# Altium PCB CH32V307V-R1-1v0.PcbDoc (part 2 of 2)
Units mil, origin at the board's own origin, x right, y up, seen from the top; angles counter-clockwise.
Board outline 2913.39 x 4072 mil, 2 copper layers (Top Layer, Bottom Layer); 76 components, 135 nets, 475 pads, 552 vias.
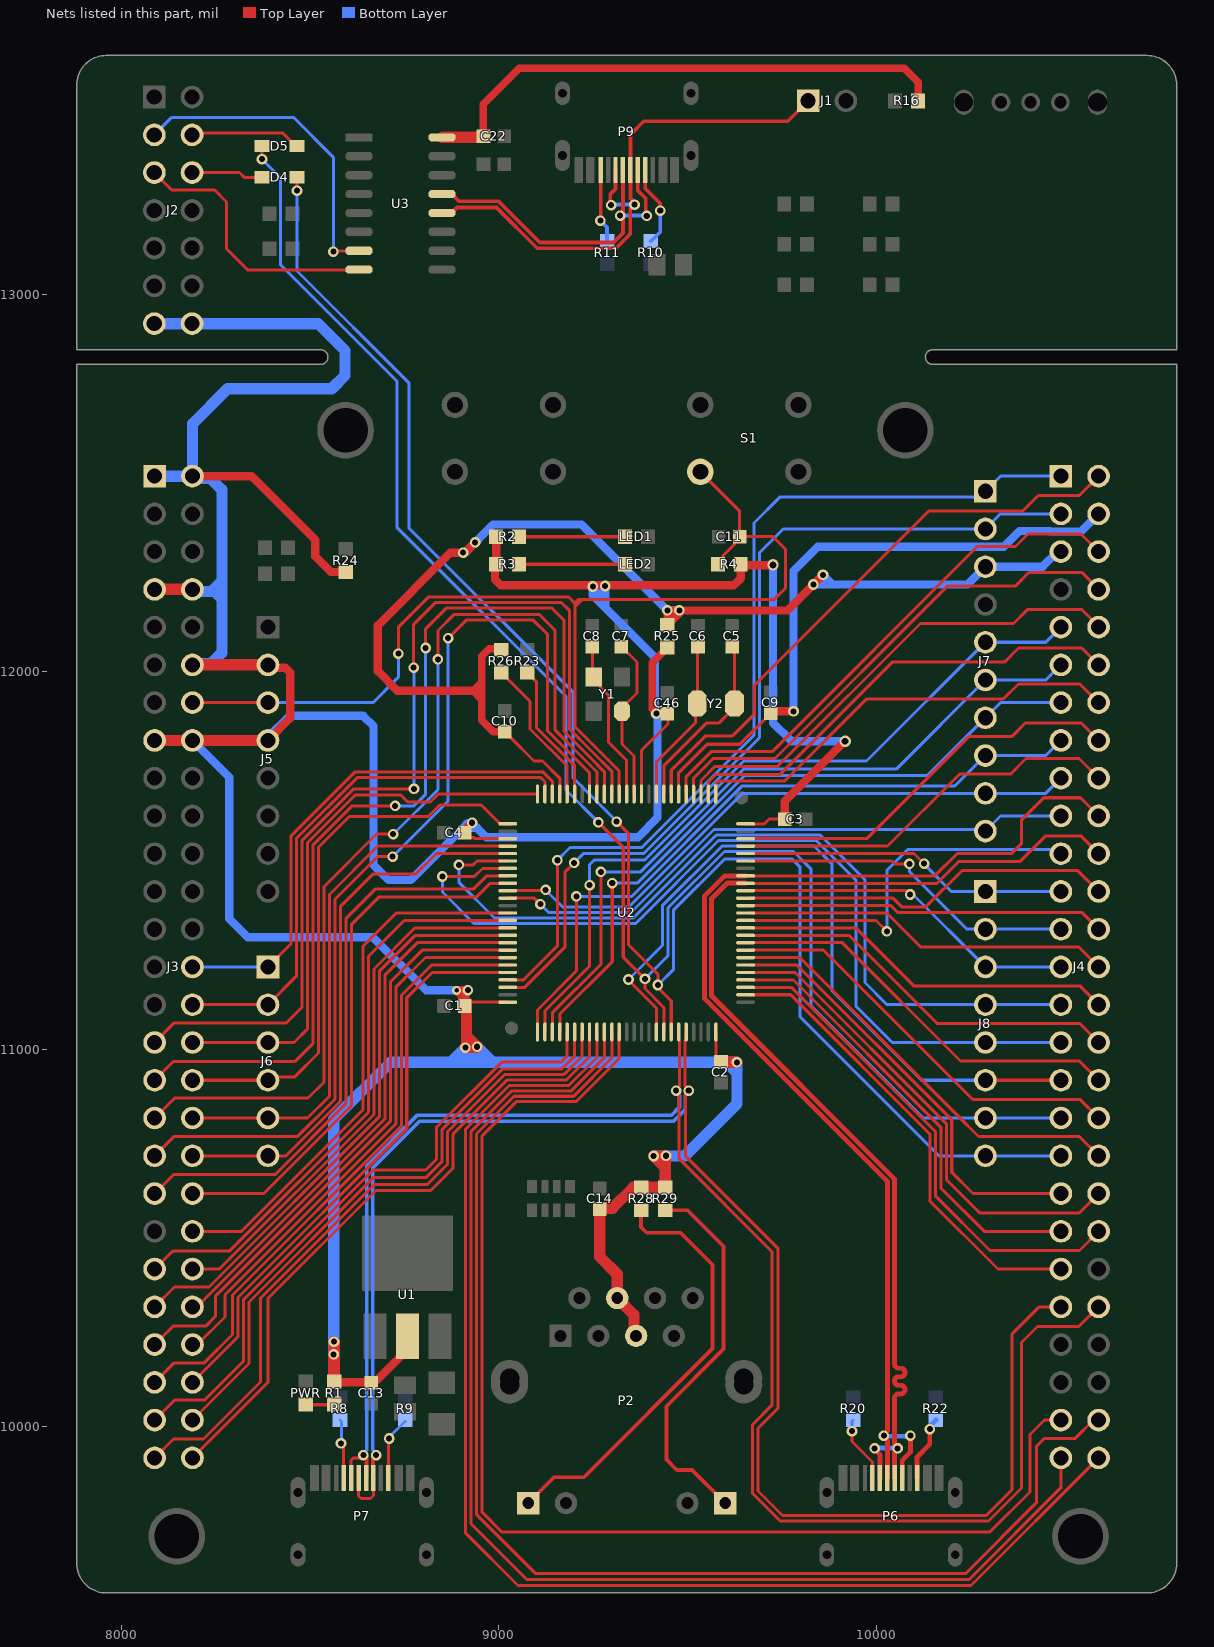
[diagram p2: the nets of this part, all layers, seen from the top]

## Via types
v1: diameter 24, hole 12, Top Layer to Bottom Layer, tented both sides, 414 vias
v2: diameter 28, hole 16, Top Layer to Bottom Layer, tented both sides, 136 vias
v3: diameter 30, hole 18, Top Layer to Bottom Layer, tented both sides, 2 vias

## Nets (pads, with @x,y where several pads share a name; then routed paths per layer and width w, separated by ;. In a path a pad name is that pad's centre, name@x,y a point inside that pad or via, vN(x,y) a via of type N, cw(c..) or ccw(c..) an arc to the next point about the centre after c; other vN are vias at no path point) (continued)
NetLED1_1: LED1.1 R2.2 | length 280.8
  Top Layer w10: R2.2@9053.09,12357.58 LED1.1@9333.89,12357.58
NetLED2_1: LED2.1 R3.2 | length 280.8
  Top Layer w10: R3.2@9053.09,12284.43 LED2.1@9333.89,12284.43
NetP2_9: P2.9 R28.2 | length 1154.7
  Top Layer w10: P2.9@9077.56,9798.21 9145.89,9866.54 9224.83,9866.54 9565.81,10207.51 9565.81,10429.31 9480.64,10514.49 9391.35,10514.49 9376.51,10529.32 R28.2@9376.51,10573.74
NetP2_12: P2.12 R29.2 | length 1024.6
  Top Layer w10: R29.2@9440.75,10573.74 9499.39,10573.74 9594.8,10478.33 9594.8,10206.17 9443.54,10054.91 9443.54,9913.35 9471.05,9885.85 9511.57,9885.85 P2.12@9599.21,9798.21
NetP6_A5: P6.A5 R20.2 | length 177.4
  Top Layer w8: v2(9934.99,9988.7) 9934.99,9961.46 9989.1,9907.36 P6.A5@9989.1,9864.31
  Bottom Layer w8: v2(9934.99,9988.7) 9934.99,10015.31 R20.2@9937.83,10018.14
NetP6_B5: P6.B5 R22.2 | length 175.1
  Top Layer w12.7: P6.B5@10107.21,9864.31 10107.21,9920.3 10140.95,9954.04 v2(10140.95,9994.1)
  Bottom Layer w12.7: v2(10140.95,9994.1) 10140.95,9998.24 10144.26,10001.56 10144.26,10006.18 10156.22,10018.14 R22.2@10157.21,10018.14
NetP7_A5: P7.A5 R8.2 | length 159.1
  Top Layer w8: v2(8581.6,9956.4) 8581.6,9951.26 8588.86,9944 P7.A5@8588.86,9864.31
  Bottom Layer w8: R8.2@8578.92,10018.14 8582.94,10014.12 8582.94,9957.74 v2(8581.6,9956.4)
NetP7_B5: P7.B5 R9.2 | length 169.2
  Top Layer w8: P7.B5@8706.97,9864.31 8707.96,9865.3 8707.96,9968.38 v2(8708.95,9969.37)
  Bottom Layer w8: v2(8708.95,9969.37) 8708.95,9972.36 8750.92,10014.33 R9.2@8751.9,10014.33
NetP9_A5: P9.A5 R10.1 | length 215.9
  Top Layer w10: P9.A5@9387.4,13329.24 9387.4,13280.03 9427.13,13240.3 v2(9427.13,13221.26)
  Bottom Layer w10: R10.1@9402.41,13140.64 9403.4,13140.64 9427.13,13164.37 v2(9427.13,13221.26)
NetP9_B5: P9.B5 R11.1 | length 196.3
  Top Layer w10: v2(9268.62,13194.6) 9269.29,13195.28 P9.B5@9269.29,13329.24
  Bottom Layer w10: v2(9268.62,13194.6) 9286.06,13177.16 9286.06,13141.05 R11.1@9286.47,13140.64
NetPWR_1: PWR.1 R1.1 | length 64.7
  Top Layer w10: PWR.1@8499.15,10058.67 8562.91,10058.67 R1.1@8563.58,10059.33
NRST: C11.2 J3.14 J5.3 R4.1 S1.1 U2.14 | length 2920.5
  Top Layer w8: J3.14@8188.19,11918.11 J5.3@8388.19,11918.11 ; v2(8733.62,12048.22) 8733.62,12118.08 8814.04,12198.51 9183.98,12198.51 9200.79,12181.69 ; U2.14@9318.51,11676.04 9318.51,11737.12 9249.59,11806.03 9200.79,11854.83 9200.79,12172.22 ; S1.1@9533.27,12529.53 9540.98,12521.82 9637.49,12425.3 C11.2@9637.49,12357.58 ; R4.1@9579.67,12284.43 9593.48,12298.24 9593.48,12306.9 9623.99,12337.42 9623.99,12344.08 C11.2@9637.49,12357.58 ; 9200.79,12172.22 9200.79,12181.69 ; 9200.79,12172.22 9220.54,12191.97 ; 9200.79,12181.69 9211.06,12191.97 9220.54,12191.97 ; 9220.54,12191.97 9729.36,12191.97 9758.81,12221.42 9758.81,12324.7 9725.93,12357.58 C11.2@9637.49,12357.58
  Bottom Layer w8: J5.3@8388.19,11918.11 8666.11,11918.11 8733.62,11985.62 v2(8733.62,12048.22)
PA0: J3.28 J6.1 U2.23 | length 1378
  Top Layer w8: J6.1@8388.19,11218.11 8448.9,11278.82 8448.9,11564.47 8618.34,11733.91 9117.36,11733.91 9141.34,11709.93 U2.23@9141.34,11676.04
  Bottom Layer w8: J3.28@8188.19,11218.11 J6.1@8388.19,11218.11
PA1: J3.30 J6.2 U2.24 | length 1433.8
  Top Layer w8: J3.30@8188.19,11118.11 J6.2@8388.19,11118.11 8463.4,11193.32 8463.4,11558.46 8624.35,11719.41 9111.35,11719.41 9121.66,11709.11 U2.24@9121.66,11676.04
PA2: J3.32 J6.3 U2.25 | length 1489.8
  Top Layer w8: J3.32@8188.19,11018.11 J6.3@8388.19,11018.11 8457.18,11018.11 8492.4,11053.33 8492.4,11546.45 8618.92,11672.97 8740.83,11672.97 8758.5,11655.31 8818.8,11655.31 8839.53,11676.04 U2.25@9101.97,11676.04
PA3: J3.34 J6.4 U2.26 | length 1486.8
  Top Layer w8: J3.34@8188.19,10918.11 J6.4@8388.19,10918.11 8397.25,10927.17 8459.14,10927.17 8522.01,10990.04 8522.01,11535.05 8603.96,11617 8813.42,11617 8843.45,11647.03 8953,11647.03 9002.73,11597.3 U2.26@9033.25,11597.3
PA4: J3.36 J6.5 U2.29 | length 1456.3
  Top Layer w8: J3.36@8188.19,10818.11 J6.5@8388.19,10818.11 8493.17,10818.11 8551.02,10875.96 8551.02,11410.12 8679.14,11538.24 8833.35,11538.24 U2.29@9033.25,11538.24
PA5: J3.38 J6.6 U2.30 | length 1478.9
  Top Layer w8: J3.38@8188.19,10718.11 8436.19,10718.11 8580.02,10861.94 8580.02,11377.93 8666.85,11464.75 8780.53,11464.75 8834.34,11518.56 U2.30@9033.25,11518.56
PA6: J4.29 J8.4 U2.31 | length 2250.4
  Top Layer w8: v2(8893.62,11488.68) 8931.68,11488.68 8941.88,11498.87 U2.31@9023.23,11498.87
  Bottom Layer w8: v2(8893.62,11488.68) 8893.62,11442.58 8988.21,11347.99 9355.91,11347.99 9575.61,11567.69 9850.54,11567.69 9969.29,11448.93 9969.29,11176.73 10027.91,11118.11 J8.4@10288.19,11118.11 J4.29@10488.19,11118.11
PA7: J4.31 J8.5 U2.32 | length 2403.5
  Top Layer w8: v2(8850.26,11457.64) 8934.59,11457.64 8956.13,11479.19 U2.32@9023.23,11479.19
  Bottom Layer w8: v2(8850.26,11457.64) 8850.26,11416.57 8933.34,11333.49 9361.92,11333.49 9581.62,11553.19 9840.41,11553.19 9945.53,11448.06 9945.53,11114.28 10041.71,11018.11 J8.5@10288.19,11018.11 J4.31@10488.19,11018.11
PA8: J4.33 J8.6 U2.67 | length 1976.8
  Top Layer w8: v2(9343,11185) 9343,11182.95 9416.93,11109.02 U2.67@9416.93,11046.12 ; J8.6@10288.19,10918.11 J4.33@10488.19,10918.11
  Bottom Layer w8: v2(9343,11185) 9343,11185.1 9432.66,11274.76 9432.66,11380.3 9591.05,11538.69 9834.4,11538.69 9882.61,11490.48 9882.61,11154.73 10119.23,10918.11 J8.6@10288.19,10918.11
PA9: D5.2 J4.35 J8.7 U2.68 | length 4607.8
  Top Layer w8: v2(8372.34,13357.58) 8372.34,13392.15 D5.2@8372.55,13392.36 ; v2(9263.26,11601.13) 9329.17,11535.21 9329.17,11243.95 9386.43,11186.68 v2(9386.82,11186.68) 9386.82,11160.83 9436.62,11111.03 U2.68@9436.62,11046.12
  Bottom Layer w8: v2(8372.34,13357.58) 8420.92,13308.99 8420.92,13078.58 8729.61,12769.89 8729.61,12382.76 9177.39,11934.98 9177.39,11687 v2(9263.26,11601.13) ; v2(9386.82,11186.68) 9447.16,11247.03 9447.16,11374.29 9597.05,11524.19 9779.82,11524.19 9826.95,11477.05 9826.95,11114.74 10123.58,10818.11 J8.7@10288.19,10818.11 J4.35@10488.19,10818.11
PA10: D4.1 J4.37 J8.8 U2.69 | length 4530
  Top Layer w8: v2(8465.11,13273.99) 8465.11,13301.75 D4.1@8472.77,13309.41 ; v2(9311.81,11603.17) 9343.67,11571.31 9343.67,11276.29 9421.02,11198.94 v2(9421.02,11170.43) ; v2@9417.32,11166.72 9456.3,11127.74 U2.69@9456.3,11046.12
  Bottom Layer w8: v2(8465.11,13273.99) 8465.11,13061.4 8761.18,12765.32 8761.18,12380.76 9196.52,11945.42 9196.52,11718.46 v2(9311.81,11603.17) ; v2(9421.02,11170.43) 9461.66,11211.06 9461.66,11368.29 9597.05,11503.68 9776.71,11503.68 9796.86,11483.53 9796.86,11086.8 10165.54,10718.11 J8.8@10288.19,10718.11 J4.37@10488.19,10718.11
PA11: J4.46 P7.A7 P7.B7 U2.70 | length 4627.8
  Top Layer w8: P7.B7@8608.55,9864.31 8608.55,9912.31 8613.82,9917.58 8640.59,9917.58 v2@8641.73,9918.72 ; v2@8644.53,9921.52 v2@8641.73,9918.72 ; v2@8649.61,9917.74 8648.79,9917.74 8648.08,9917.74 8647.1,9918.72 v2@8641.73,9918.72 ; v2(9469.08,10890.77) 9469.08,10894.74 9478.58,10904.24 9478.58,11023.03 9475.99,11025.62 U2.70@9475.99,11046.12 ; v2@9472.71,10887.49 9472.71,10881.99 9477.35,10877.35 9477.35,10709.99 9722.47,10464.87 9722.47,10057.03 9671.39,10005.94 9671.39,10002.5 9671.29,10002.4 9671.29,9824.33 9744.95,9750.66 10296.22,9750.66 10384,9838.44 10384,10223.47 10426.32,10265.79 10535.87,10265.79 J4.46@10588.19,10318.11
  Top Layer w10: v2(8641.01,9925.05) 8641.48,9925.05 8648.79,9917.74 v2@8648.95,9917.58 ; P7.A7@8647.92,9864.31 8648.82,9865.22 8648.82,9904.27 8649.61,9905.06 v2@8649.61,9917.74
  Bottom Layer w10: v2(8641.01,9925.05) 8641.01,9929.73 8650.01,9938.73 8650.01,10691.88 8783.3,10825.18 9456.16,10825.18 9478.08,10847.1 9478.08,10877.08 9469.08,10886.08 v2(9469.08,10890.77)
PA12: J4.45 P7.A6 P7.B6 U2.71 | length 4569.4
  Top Layer w8: P7.A6@8628.23,9864.31 8628.23,9817.24 8634.96,9810.51 8659.61,9810.51 8667.6,9818.5 P7.B6@8667.6,9864.31 ; U2.71@9495.67,11046.12 9495.67,11025.62 9493.08,11023.03 9493.08,10904.24 ; v2@9498.94,10887.49 9498.94,10881.99 9494.31,10877.35 9494.31,10717.02 9739.43,10471.89 9739.43,10050 9685.81,9996.38 9685.81,9830.34 9750.97,9765.18 10290.2,9765.18 10359.26,9834.24 10359.26,10246.41 10430.96,10318.11 J4.45@10488.19,10318.11 ; v2(9502.58,10890.77) v2@9502.58,10892.75 ; 9493.08,10904.24 9493.08,10902.25 v2@9502.58,10892.75 ; 9493.08,10904.24 9502.58,10894.74 v2@9502.58,10892.75
  Top Layer w10: P7.B6@8667.6,9864.31 8666.7,9865.22 8666.7,9904.27 8665.51,9905.46 8665.51,9917.66 8672.89,9925.05 v2(8674.51,9925.05)
  Bottom Layer w10: v2(8674.51,9925.05) 8674.51,9929.73 8665.51,9938.73 8665.51,10685.46 8789.72,10809.68 9462.58,10809.68 9493.58,10840.67 9493.58,10877.08 9502.58,10886.08 v2@9502.58,10886.79
PA15: J4.43 U2.77 | length 1229.9
  Top Layer w8: U2.77@9663.17,11144.54 9772.45,11144.54 10141.12,10775.87 10141.12,10598.34 10321.35,10418.11 J4.43@10488.19,10418.11
PB0: J4.17 J7.9 U2.35 | length 1625.8
  Top Layer w8: U2.35@9023.23,11420.13 9121.46,11420.13 v2(9123.45,11422.13)
  Bottom Layer w8: v2(9123.45,11422.13) 9168.59,11376.99 9343.9,11376.99 9645.02,11678.11 J7.9@10288.19,11678.11 10448.19,11678.11 J4.17@10488.19,11718.11
PB1: J4.19 J7.10 U2.36 | length 1589.9
  Top Layer w8: U2.36@9023.23,11400.45 9093.66,11400.45 v2(9109.6,11384.51)
  Bottom Layer w8: v2(9109.6,11384.51) 9131.62,11362.49 9349.91,11362.49 9569.6,11582.19 10284.11,11582.19 J7.10@10288.19,11578.11 10328.19,11618.11 J4.19@10488.19,11618.11
PB3: J4.26 U2.89 | length 951
  Top Layer w8: U2.89@9663.17,11380.76 10037.7,11380.76 10055.59,11362.88 10543.42,11362.88 J4.26@10588.19,11318.11
PB4: J4.24 U2.90 | length 997.2
  Top Layer w8: U2.90@9663.17,11400.45 10043.92,11400.45 10066.99,11377.38 10130.51,11377.38 10226.46,11473.33 10532.97,11473.33 J4.24@10588.19,11418.11
PB5: J4.27 J8.3 U2.91 | length 912.8
  Top Layer w8: U2.91@9663.17,11420.13 10078.16,11420.13 10088.29,11410 v2(10089,11410)
  Bottom Layer w8: v2(10089,11410) 10096.3,11410 10281.22,11225.08 10281.22,11218.11 J4.27@10488.19,11218.11
PB6: J4.22 P6.A7 P6.B7 U2.92 | length 3078.9
  Top Layer w8: U2.92@9653.15,11439.82 10160.11,11439.82 10217.16,11496.87 10379.19,11496.87 10447.76,11565.44 10540.86,11565.44 J4.22@10588.19,11518.11
  Top Layer w12.7: U2.92@9653.15,11440.56 9604.72,11440.56 9562.91,11398.75 9562.91,11141.86 10047.41,10657.36 10047.41,10210.72 10047.41,10166.95 ccw(c10058.76,10166.95) 10058.76,10155.6 10064.08,10155.6 cw(c10064.08,10144.25) 10064.08,10132.9 10058.76,10132.9 ccw(c10058.76,10121.55) 10058.76,10110.2 10064.08,10110.2 cw(c10064.08,10098.85) 10064.08,10087.5 10058.76,10087.5 ccw(c10058.76,10076.15) 10047.41,10076.15 10047.41,10047.1 10047.41,9955.76 10056.04,9947.13 v2(10056.04,9942.99) 10056.04,9941.12 10047.41,9932.49 10047.41,9893.6 10047.71,9893.3 10047.71,9864.75 P6.A7@10048.15,9864.31 ; v2@9994.82,9945.34 9994.82,9941.2 10008.78,9927.24 P6.B7@10008.78,9864.31
  Bottom Layer w12.7: v2@9994.82,9945.34 9995.99,9944.16 10054.86,9944.16 v2(10056.04,9942.99)
  other v2: 9994.82,9942.99
PB7: J4.20 P6.A6 P6.B6 U2.93 | length 3151.1
  Top Layer w8: U2.93@9653.15,11459.5 10154.18,11459.5 10212.94,11518.27 10356.96,11518.27 10384.5,11545.8 10384.5,11608.12 10442.66,11666.28 10540.02,11666.28 J4.20@10588.19,11618.11
  Top Layer w12.7: U2.93@9653.15,11458.76 9597.18,11458.76 9544.71,11406.29 9544.71,11134.32 10029.21,10649.82 10029.21,9989.48 10019.44,9979.71 10019.44,9974.05 10029.21,9964.28 10029.21,9893.6 10028.91,9893.3 10028.91,9864.75 P6.A6@10028.47,9864.31 ; P6.B6@10067.84,9864.31 10067.84,9911.13 10089.65,9932.94 v2(10089.65,9977.13)
  Bottom Layer w12.7: v2@10019.44,9975.57 10088.08,9975.57 v2(10089.65,9977.13)
  other v2: 10019.44,9977.13
PB8: J4.25 J8.2 U2.95 | length 911.9
  Top Layer w8: U2.95@9663.17,11498.87 10040.94,11498.87 10048.82,11490.99 v2(10087.06,11490.99)
  Bottom Layer w8: v2(10087.06,11490.99) 10087.06,11470.45 10239.4,11318.11 J4.25@10488.19,11318.11
PB9: J4.23 J8.1 U2.96 | length 867.6
  Top Layer w8: U2.96@9663.17,11518.56 10099.32,11518.56 v2(10125.93,11491.94)
  Bottom Layer w8: v2(10125.93,11491.94) 10135.22,11482.66 10135.22,11481 10198.11,11418.11 J8.1@10288.19,11418.11 J4.23@10488.19,11418.11
PB10: J4.1 J7.1 U2.47 | length 2480.2
  Top Layer w8: U2.47@9023.23,11183.91 9064.68,11183.91 9154.57,11273.81 v2(9154.57,11500.76)
  Bottom Layer w8: v2(9154.57,11500.76) 9188.12,11534.31 9378.19,11534.31 9675.34,11831.47 9675.34,12394.21 9743.63,12462.5 10272.58,12462.5 10328.19,12518.11 J4.1@10488.19,12518.11
PB11: J4.3 J7.2 U2.48 | length 2387.6
  Top Layer w8: U2.48@9023.23,11164.23 9068.36,11164.23 9174.39,11270.25 9174.39,11469.16 v2(9198.87,11493.65)
  Bottom Layer w8: v2(9198.87,11493.65) 9223.36,11518.14 9382.52,11518.14 9689.84,11825.46 9689.84,12314.92 9753.03,12378.11 J7.2@10288.19,12378.11 10328.19,12418.11 J4.3@10488.19,12418.11
PB12: J4.15 J7.8 U2.51 | length 1855.9
  Top Layer w8: U2.51@9101.97,11046.12 9101.97,11104.21 9205,11207.24 v2(9205,11405)
  Bottom Layer w8: v2(9205,11405) 9351.4,11405 9644.17,11697.77 10207.85,11697.77 J7.8@10288.19,11778.11 10448.19,11778.11 J4.15@10488.19,11818.11
PB13: J4.9 J7.5 U2.52 | length 2000.8
  Top Layer w8: U2.52@9121.66,11046.12 9121.66,11101.9 9240,11220.25 v2(9240,11435)
  Bottom Layer w8: v2(9240,11435) 9240,11489.23 9252.15,11501.38 9386.26,11501.38 9648.34,11763.46 9973.54,11763.46 J7.5@10288.19,12078.11 10448.19,12078.11 J4.9@10488.19,12118.11
PB14: J4.11 J7.6 U2.53 | length 1922.4
  Top Layer w8: U2.53@9141.34,11046.12 9141.34,11096.78 9270,11225.44 v2(9270,11470)
  Bottom Layer w8: v2(9270,11470) 9375.39,11470 9647.43,11742.04 10052.12,11742.04 J7.6@10288.19,11978.11 10448.19,11978.11 J4.11@10488.19,12018.11
PB15: J4.13 J7.7 U2.54 | length 1837.7
  Top Layer w8: U2.54@9161.03,11046.12 9161.03,11093.34 9300,11232.32 v2(9300,11440)
  Bottom Layer w8: v2(9300,11440) 9365.9,11440 9651.51,11725.62 10135.7,11725.62 J7.7@10288.19,11878.11 10328.19,11918.11 J4.13@10488.19,11918.11
PC0: J3.31 U2.15 | length 2637.5
  Top Layer w8: J3.31@8088.19,11018.11 8140.26,11070.18 8437.42,11070.18 8477.9,11110.66 8477.9,11552.46 8615.44,11690 v2(8775,11690) ; v2(8773.95,12011.07) 8773.95,12125.59 8831.26,12182.9 9165.9,12182.9 9186.29,12162.5 9186.29,11848.83 9243.58,11791.53 9298.82,11736.3 U2.15@9298.82,11676.04
  Bottom Layer w8: v2(8773.95,12011.07) 8775,12010.03 v2(8775,11690)
PC1: J3.33 U2.16 | length 2684.6
  Top Layer w8: J3.33@8088.19,10918.11 8138.18,10968.1 8460.35,10968.1 8506.9,11014.65 8506.9,11540.44 8611.46,11645 v2(8725,11645) ; v2(8806.03,12062.87) 8806.03,12114.12 8860.3,12168.4 9140.32,12168.4 9171.79,12136.93 9171.79,11842.82 9237.58,11777.03 9279.14,11735.48 U2.16@9279.14,11676.04
  Bottom Layer w8: v2(8725,11645) 8775.23,11645 8806.03,11675.8 v2(8806.03,12062.87)
PC2: J3.35 U2.17 | length 2659.5
  Top Layer w8: J3.35@8088.19,10818.11 8141.07,10870.99 8494.44,10870.99 8536.51,10913.06 8536.51,11430.94 8675.75,11570.17 v2(8719.92,11570.17) ; v2(8838.42,12032.8) 8838.42,12109.15 8880.35,12151.08 9107.19,12151.08 9148.76,12109.51 9148.76,11845.34 9231.57,11762.53 9259.45,11734.66 U2.17@9259.45,11676.04
  Bottom Layer w8: v2(8719.92,11570.17) 8720.91,11570.17 8838.42,11687.69 v2(8838.42,12032.8)
PC3: J3.37 U2.18 | length 2675.1
  Top Layer w8: J3.37@8088.19,10718.11 8138.63,10768.55 8466.13,10768.55 8565.52,10867.95 8565.52,11397.43 8678.37,11510.28 v2(8718.14,11510.28) ; v2(8865.48,12088.78) 8913.28,12136.58 9090.73,12136.58 9128.33,12098.98 9128.33,11843.61 9239.77,11732.17 U2.18@9239.77,11676.04
  Bottom Layer w8: v2(8718.14,11510.28) 8865.48,11657.62 v2(8865.48,12088.78)
PC4: J3.39 U2.33 | length 1570.5
  Top Layer w8: J3.39@8088.19,10618.11 8138.19,10668.11 8406.7,10668.11 8594.52,10855.93 8594.52,11345.72 8673.88,11425.08 8933.15,11425.08 8967.57,11459.5 U2.33@9023.23,11459.5
PC5: J3.40 U2.34 | length 1456.7
  Top Layer w8: J3.40@8188.19,10618.11 8377.2,10618.11 8609.02,10849.93 8609.02,11330.08 8682.76,11403.82 8940.87,11403.82 8976.87,11439.82 U2.34@9023.23,11439.82
PC10: J4.42 U2.78 | length 1334.6
  Top Layer w8: U2.78@9663.17,11164.23 9773.85,11164.23 10155.62,10782.46 10155.62,10612.12 10300.55,10467.2 10537.28,10467.2 J4.42@10588.19,10518.11
PC11: J4.41 U2.79 | length 1195
  Top Layer w8: U2.79@9663.17,11183.91 9779.85,11183.91 10170.12,10793.64 10170.12,10632.85 10284.87,10518.11 J4.41@10488.19,10518.11
PC12: J4.40 U2.80 | length 1296.7
  Top Layer w8: U2.80@9663.17,11203.6 9784.01,11203.6 10184.62,10802.98 10184.62,10655.3 10273.34,10566.59 10536.67,10566.59 J4.40@10588.19,10618.11
PC13: J4.2 U2.7 | length 1562.3
  Top Layer w8: U2.7@9456.3,11676.04 9456.3,11739.03 9547.48,11830.2 9618.96,11830.2 9676.16,11887.4 9676.16,11963.69 10138.8,12426.33 10387.87,12426.33 10428.47,12466.94 10537.02,12466.94 J4.2@10588.19,12518.11
PC14: C5.1 U2.8 Y2.1 | length 486.4
  Top Layer w8: U2.8@9436.62,11676.04 9436.62,11751.28 9549.09,11863.76 9581.83,11863.76 9623.6,11905.52 Y2.1@9623.6,11915.89 9623.6,12065.21 C5.1@9624.02,12065.63
PC15: C6.1 U2.9 Y2.2 | length 435.1
  Top Layer w8: U2.9@9416.93,11676.04 9416.93,11761.66 9521.11,11865.84 9521.11,11875.84 9521.11,11911.83 Y2.2@9525.17,11915.89 9525.17,12059.94 C6.1@9529.65,12064.42
PD0: J4.39 U2.81 | length 1157
  Top Layer w8: U2.81@9663.17,11223.28 9789,11223.28 10199.12,10813.16 10199.12,10674.28 10255.3,10618.11 J4.39@10488.19,10618.11
PD1: J4.38 U2.82 | length 1142.4
  Top Layer w8: U2.82@9663.17,11242.97 9796.47,11242.97 10213.96,10825.48 10270.27,10769.17 10537.13,10769.17 J4.38@10588.19,10718.11
PD2: J4.36 U2.83 | length 1109.2
  Top Layer w8: U2.83@9663.17,11262.65 9859.52,11262.65 10255.65,10866.52 10539.78,10866.52 J4.36@10588.19,10818.11
PD3: J4.34 U2.84 | length 1075.9
  Top Layer w8: U2.84@9663.17,11282.34 9909.34,11282.34 10222.55,10969.12 10537.18,10969.12 J4.34@10588.19,10918.11
PD4: J4.32 U2.85 | length 1042.6
  Top Layer w8: U2.85@9663.17,11302.02 9926.89,11302.02 10159.94,11068.98 10537.32,11068.98 J4.32@10588.19,11018.11
PD5: J4.30 U2.86 | length 1009.4
  Top Layer w8: U2.86@9663.17,11321.71 9944.72,11321.71 10098.35,11168.08 10538.22,11168.08 J4.30@10588.19,11118.11
PD6: J4.21 U2.87 | length 1025.8
  Top Layer w8: U2.87@9663.17,11341.39 9998.59,11341.39 v2(10027.56,11312.43)
  Bottom Layer w8: v2(10027.56,11312.43) 10027.56,11474.42 10081.76,11528.62 10458.74,11528.62 10459.49,11527.87 10478.43,11527.87 J4.21@10488.19,11518.11
PD7: J4.28 U2.88 | length 984.2
  Top Layer w8: U2.88@9663.17,11361.08 9907.48,11361.08 10026.77,11361.08 10116.37,11271.48 10534.82,11271.48 J4.28@10588.19,11218.11
PD8: J3.51 U2.55 | length 1700.7
  Top Layer w8: J3.51@8088.19,10018.11 8141.88,10071.79 8221.37,10071.79 8323.04,10173.46 8323.04,10232.45 8323.27,10232.69 8323.27,10336.85 8666.99,10680.56 8806.37,10680.56 8835.19,10709.38 8835.19,10794.22 9007.03,10966.07 9164.07,10966.07 9180.71,10982.71 U2.55@9180.71,11046.12
PD9: J3.52 U2.56 | length 1620.9
  Top Layer w8: J3.52@8188.19,10018.11 8337.77,10167.69 8337.77,10330.84 8668.09,10661.15 8807.46,10661.15 8849.69,10703.38 8849.69,10788.22 9009.72,10948.24 9166.75,10948.24 9200.4,10981.89 U2.56@9200.4,11046.12
PD10: J3.53 U2.57 | length 1817.7
  Top Layer w8: J3.53@8088.19,9918.11 8138.15,9968.07 8217.65,9968.07 8368.35,10118.77 8368.35,10340.91 8669.15,10641.71 8809.58,10641.71 8864.19,10696.32 8864.19,10782.21 9015.72,10933.74 9172.76,10933.74 9220.08,10981.06 U2.57@9220.08,11046.12
PD11: J3.54 U2.58 | length 1740.5
  Top Layer w8: J3.54@8188.19,9918.11 8387.83,10117.75 8387.83,10339.89 8674.36,10626.41 8819.35,10626.41 8878.69,10685.75 8878.69,10776.2 9021.73,10919.24 9178.77,10919.24 9239.77,10980.24 U2.58@9239.77,11046.12
PD12: J4.54 U2.59 | length 3437.8
  Top Layer w8: U2.59@9259.45,11046.12 9259.45,10978.44 9185.75,10904.74 9027.73,10904.74 8911.97,10788.98 8911.97,9718.52 9050.53,9579.96 10250.04,9579.96 J4.54@10588.19,9918.11
PD13: J4.53 U2.60 | length 3344.3
  Top Layer w8: U2.60@9279.14,11046.12 9279.14,10977.62 9191.76,10890.24 9033.74,10890.24 8926.47,10782.98 8926.47,9743.12 9073.59,9596.01 10245.58,9596.01 10488.19,9838.62 J4.53@10488.19,9918.11
PD14: J4.52 U2.61 | length 3487
  Top Layer w8: U2.61@9298.82,11046.12 9298.82,10976.8 9197.77,10875.74 9039.75,10875.74 8940.97,10776.97 8940.97,9767.67 9097.17,9611.47 10235.29,9611.47 10424.14,9800.33 10424.14,9949.46 10444.55,9969.87 10526.2,9969.87 10574.44,10018.11 J4.52@10588.19,10018.11
PD15: J4.51 U2.62 | length 3281.1
  Top Layer w8: U2.62@9318.51,11046.12 9318.51,10975.98 9203.77,10861.24 9045.75,10861.24 8955.47,10770.96 8955.47,9773.67 9006.95,9722.2 10300.73,9722.2 10406.29,9827.77 10406.29,9979.87 10444.54,10018.11 J4.51@10488.19,10018.11
PE0: J4.18 U2.97 | length 1052.6
  Top Layer w8: U2.97@9653.15,11538.24 10029.02,11538.24 10219.64,11728.87 10354.46,11728.87 10395.7,11770.1 10536.2,11770.1 J4.18@10588.19,11718.11
PE1: J4.16 U2.98 | length 1081.5
  Top Layer w8: U2.98@9653.15,11557.93 9974.13,11557.93 10244.34,11828.14 10357.86,11828.14 10394.56,11864.83 10541.47,11864.83 J4.16@10588.19,11818.11
PE2: J4.14 U2.1 | length 1171.6
  Top Layer w8: U2.1@9574.41,11676.04 9574.41,11703.95 9581.74,11711.27 9757.4,11711.27 9974.4,11928.28 10336.1,11928.28 10375.65,11967.83 10538.47,11967.83 J4.14@10588.19,11918.11
PE3: J4.12 U2.2 | length 1231.6
  Top Layer w8: U2.2@9554.73,11676.04 9554.73,11709.03 9573.22,11727.53 9743.64,11727.53 10041.49,12025.37 10338.59,12025.37 10376.16,12062.95 10543.35,12062.95 J4.12@10588.19,12018.11
PE4: J4.10 U2.3 | length 1296.6
  Top Layer w8: U2.3@9535.04,11676.04 9535.04,11712.03 9572.37,11749.35 9737.85,11749.35 10116.32,12127.82 10362.72,12127.82 10399.14,12164.24 10543.86,12164.24 10588.19,12119.91 J4.10@10588.19,12118.11
PE5: J4.8 U2.4 | length 1359.4
  Top Layer w8: U2.4@9515.36,11676.04 9515.36,11718.13 9567.46,11770.23 9730.77,11770.23 10188.23,12227.69 10368.49,12227.69 10403.99,12263.2 10543.1,12263.2 J4.8@10588.19,12218.11
PE6: J4.6 U2.5 | length 1424
  Top Layer w8: U2.5@9495.67,11676.04 9495.67,11722.16 9561.95,11788.44 9723.41,11788.44 10266.78,12331.81 10368.15,12331.81 10400.95,12364.62 10541.68,12364.62 J4.6@10588.19,12318.11
PE7: J3.42 U2.38 | length 1447.9
  Top Layer w8: J3.42@8188.19,10518.11 8318.21,10518.11 8639.79,10839.69 8639.79,11272.79 8728.09,11361.08 U2.38@9033.25,11361.08
PE8: J3.43 U2.39 | length 1569.3
  Top Layer w8: J3.43@8088.19,10418.11 8136.57,10466.49 8287.1,10466.49 8654.29,10833.68 8654.29,11246.4 8749.29,11341.39 U2.39@9033.25,11341.39
PE9: J3.44 U2.40 | length 1445
  Top Layer w8: J3.44@8188.19,10418.11 8259.23,10418.11 8668.79,10827.68 8668.79,11212.84 8777.66,11321.71 U2.40@9033.25,11321.71
PE10: J3.45 U2.41 | length 1578.2
  Top Layer w8: J3.45@8088.19,10318.11 8140.6,10370.51 8232.14,10370.51 8683.29,10821.67 8683.29,11206.84 8778.48,11302.02 U2.41@9033.25,11302.02
PE11: J3.46 U2.42 | length 1467.5
  Top Layer w8: J3.46@8188.19,10318.11 8200.24,10318.11 8697.79,10815.67 8697.79,11196.4 8783.73,11282.34 U2.42@9033.25,11282.34
PE12: J3.47 U2.43 | length 1625.2
  Top Layer w8: J3.47@8088.19,10218.11 8136.93,10266.85 8223.33,10266.85 8248.68,10292.2 8248.68,10346.05 8712.29,10809.66 8712.29,11178.32 8796.63,11262.65 U2.43@9033.25,11262.65
PE13: J3.48 U2.44 | length 1516.1
  Top Layer w8: J3.48@8188.19,10218.11 8201.26,10218.11 8274.53,10291.39 8274.53,10350 8726.79,10802.26 8726.79,11164.54 8805.22,11242.97 U2.44@9033.25,11242.97
PE14: J3.49 U2.45 | length 1667.1
  Top Layer w8: J3.49@8088.19,10118.11 8138.94,10168.86 8218.44,10168.86 8294.27,10244.7 8294.27,10349.24 8741.29,10796.26 8741.29,11142.84 8821.74,11223.28 U2.45@9033.25,11223.28
PE15: J3.50 U2.46 | length 1558.7
  Top Layer w8: J3.50@8188.19,10118.11 8308.77,10238.69 8308.77,10342.85 8755.79,10789.87 8755.79,11136.4 8822.99,11203.6 U2.46@9033.25,11203.6
RX: D4.2 J2.6 | length 190.6
  Top Layer w8: J2.6@8187.19,13322 8312.77,13322 8325.36,13309.41 D4.2@8372.55,13309.41
RX0: J2.3 U3.7 | length 856.3
  Top Layer w8: v2(8561.45,13112.5) 8562.73,13113.78 8628.08,13113.78 U3.7@8629.36,13115.06
  Bottom Layer w8: J2.3@8087.19,13422 8133.6,13468.41 8455.57,13468.41 8561.45,13362.53 v2(8561.45,13112.5)
TX: D5.1 J2.4 | length 294.1
  Top Layer w8: J2.4@8187.19,13422 8191.49,13426.3 8428.17,13426.3 8462.11,13392.36 D5.1@8465.46,13392.36
TX0: J2.5 U3.8 | length 721.9
  Top Layer w8: J2.5@8087.19,13322 8133.52,13275.67 8246.98,13275.67 8278.39,13244.26 8278.39,13120.07 8334.03,13064.43 8628.73,13064.43 U3.8@8629.36,13065.06
USB_N: P9.A7 P9.B7 U3.13 | length 911
  Top Layer w10: U3.13@8849.36,13265.06 8874.94,13265.06 8893.82,13246.18 8999.08,13246.18 9108.14,13137.12 9303.45,13137.12 9328.35,13162.02 P9.A7@9328.35,13329.24 ; P9.B7@9367.72,13329.24 9367.72,13274.3 9388.92,13253.11 v2@9388.92,13207.27
  Bottom Layer w10: v2(9321,13208) 9390.71,13208 v2(9391.44,13207.27)
USB_P: J1.1 P9.A6 P9.B6 U3.12 | length 1509.6
  Top Layer w10: U3.12@8849.36,13215.06 8874.88,13215.06 8889.14,13229.32 8993.45,13229.32 9101.15,13121.62 9309.87,13121.62 9347.52,13159.27 9347.52,13223.9 9358.93,13235.31 9358.93,13242.16 9348.03,13253.06 P9.A6@9348.03,13329.24 9348.03,13422.89 9383.3,13458.16 9764.86,13458.16 J1.1@9818.79,13512.1 ; v2@9295,13235 9295,13264.99 9308.66,13278.65 P9.B6@9308.66,13329.24
  Bottom Layer w10: v2@9295,13235 9297.29,13237.29 v2(9358.93,13237.29)
  other v2: 9297,13236
V33: C22.1 R16.2 U3.16 | length 1456
  Top Layer w20: C22.1@8958.96,13412.98 8958.96,13502.9 9053.86,13597.8 10073.76,13597.8 10109.84,13561.72 R16.2@10109.84,13511.61
  Top Layer w30: U3.16@8849.36,13415.06 8850.27,13415.97 8956.95,13415.97 C22.1@8958.96,13417.98
VBAT: C9.2 J4.4 U2.6 | length 1672
  Top Layer w8: U2.6@9475.99,11676.04 9475.99,11732.56 9551.42,11807.99 9638.06,11807.99 C9.2@9720.24,11890.17
  Top Layer w22: C9.2@9720.24,11890.17 9725.86,11895.8 9726.66,11895 v2(9780,11895)
  Bottom Layer w22: v2(9780,11895) 9780,12266.96 9844.39,12331.36 10337.27,12331.36 10378.45,12372.53 10459.15,12372.53 10460.06,12371.61 10541.69,12371.61 J4.4@10588.19,12418.11
VCC: C1.2 C2.2 C3.1 C4.2 C13.1 C14.2 C46.1 J2.13 J2.14 J3.1 J3.2 J3.7 J3.8 J3.12 J3.15 J3.16 J5.2 J5.4 P2.4 P2.5 R1.2 R2.1 R3.1 R4.2 R24.2 R25.1 R28.1 R29.1 U1.2 U2.11 U2.28 U2.50 U2.75 U2.100 | length 13770.1
  Top Layer w8: C1.2@8914.2,11124.86 U2.50@9023.23,11124.86 ; C4.2@8915.84,11587.22 8915.84,11568.34 8922.67,11561.5 8932.01,11561.5 8935.59,11557.93 U2.28@9023.23,11557.93 ; U2.11@9377.56,11676.04 9377.56,11791.75 9447.5,11861.69 C46.1@9447.5,11888.9 ; U2.75@9574.41,11046.12 9574.41,10998.9 9574.53,10998.79 9574.53,10980.76 C2.2@9588.03,10967.26 ; U2.100@9653.15,11597.3 9703.08,11597.3 9715.69,11609.91 C3.1@9757.17,11609.89
  Top Layer w20: v2(9416.93,11888.91) 9416.93,11891.07 9405.98,11902.03 9405.98,12023.69 9436.88,12054.6 9436.88,12055.58 9445.19,12063.89 R25.1@9446.17,12063.89
  Top Layer w22: J3.2@8188.19,12518.11 8344.47,12518.11 8513.72,12348.86 8513.72,12305.04 8554.55,12264.21 R24.2@8593.69,12264.21 ; J5.4@8388.19,11818.11 8447.11,11877.03 8447.11,11997.63 8433.9,12010.84 8395.46,12010.84 J5.2@8388.19,12018.11 ; R1.2@8563.58,10119.96 8564.99,10118.55 8662.26,10118.55 C13.1@8662.69,10118.12 ; C13.1@8661.71,10117.14 C13.1@8662.69,10118.12 ; C13.1@8665.89,10114.93 C13.1@8662.69,10118.12 ; U1.2@8757.73,10240.25 8738.73,10221.25 8738.73,10185.88 8676.99,10124.14 8668.71,10124.14 C13.1@8662.69,10118.12 ; C1.2@8911.78,11111.16 8902.17,11120.76 8902.17,11140.97 8887.65,11155.49 v1(8887.65,11156.03) 8887.91,11156.28 v2@8913.58,11156.28 ; C1.2@8914.17,11124.89 8911.15,11127.91 8911.15,11153.85 v2@8913.58,11156.28 ; C4.2@8915.84,11587.22 v2(8928.71,11600.1) ; v2(8917.62,11156.54) 8913.83,11156.54 v2@8913.58,11156.28 ; v2@8918.52,11157.33 8917.48,11156.28 v2@8913.58,11156.28 ; R2.1@8992.46,12357.58 R3.1@8992.46,12284.43 8989.53,12281.51 8989.53,12244.13 9004.96,12228.71 9621.5,12228.71 9640.41,12247.62 R4.2@9640.41,12281.93 ; v2(9416.93,11888.91) C46.1@9446.17,11888.9 ; R4.2@9640.41,12283.5 R4.2@9640.41,12281.93 ; v3(9725.84,12283) 9724.78,12281.93 R4.2@9640.41,12281.93 ; C3.1@9757.17,11609.89 9757.17,11657.06 9916.1,11815.99 v3(9916.78,11815.99)
  Top Layer w30: J3.15@8088.19,11818.11 J3.16@8188.19,11818.11 J5.4@8388.19,11818.11 ; J3.7@8088.19,12218.11 J3.8@8188.19,12218.11 ; J3.12@8188.19,12018.11 J5.2@8388.19,12018.11 ; v2(8562.08,10192.28) 8562.08,10121.46 R1.2@8563.58,10119.96 8563.58,10225.36 v2(8563.1,10225.83) ; C1.2@8914.17,11124.89 8914.17,11034.81 ; P2.5@9363.19,10241.2 9357.63,10246.76 9357.63,10296.76 P2.4@9313.19,10341.2 9313.19,10404.52 9267.28,10450.43 C14.2@9267.28,10576.55 9270.28,10579.55 9301.05,10579.55 9355.87,10634.37 R28.1@9376.51,10634.37 R29.1@9440.75,10634.37 9440.75,10686.49 ; v2(9442.38,10718.13) v2@9441.78,10717.53 ; C2.2@9588.03,10967.26 9589.85,10965.43 v2(9630.19,10965.43) ; 8914.17,11034.81 v2(8942.13,11006.85) 8940.04,11004.75 v2(8911.03,11004.75) 8914.17,11007.9 8914.17,11034.81 ; 9440.75,10686.49 v2(9409.71,10717.53) v2@9441.78,10717.53 ; 9440.75,10686.49 9440.75,10716.49 v2@9441.78,10717.53
  Bottom Layer w22: J3.16@8188.19,11818.11 8285.3,11721 8285.3,11346.08 8334.82,11296.55 8666.51,11296.55 8806.52,11156.54 v2(8917.62,11156.54) ; J5.4@8388.19,11818.11 8388.19,11826.61 8444.8,11883.22 8640.4,11883.22 8667.5,11856.12 8667.5,11488.79 8707.95,11448.33 8766.4,11448.33 8904.62,11586.55 ; v3@9727.57,12284.03 9725.98,12282.44 9725.98,11864.13 9774.12,11815.99 v3(9916.78,11815.99) ; 8904.62,11586.55 8942.27,11586.55 ; 8904.62,11586.55 8917.02,11598.95 8927.57,11598.95 v2(8928.71,11600.1) 8942.27,11586.55 ; 8942.27,11586.55 8967.18,11561.64 9367.97,11561.64 9419.79,11613.46 9419.79,11880.35 9412.85,11887.29 9412.85,12038.24 9281.37,12169.72 ; 9261.33,12189.76 9281.37,12169.72 ; 9261.33,12189.76 9248.75,12202.34 v2(9248.75,12225.79) 9249.39,12226.43 9265.06,12226.43 ; 9261.33,12189.76 9265.06,12193.48 9265.06,12226.43 ; 9265.06,12226.43 9280.73,12226.43 v2(9281.37,12227.07) 9281.37,12169.72
  Bottom Layer w30: J2.13@8087.19,12922 J2.14@8187.19,12922 8520.69,12922 8592.17,12850.52 8592.17,12784.58 8557.21,12749.62 8281.39,12749.62 8188.19,12656.42 J3.2@8188.19,12518.11 ; J3.1@8089.02,12516.53 8090.6,12518.11 J3.2@8188.19,12518.11 ; J3.12@8188.19,12018.11 8191.2,12021.12 8237.23,12021.12 8266.64,12050.53 8266.64,12192.67 ; J3.8@8188.19,12218.11 8193.93,12212.37 8238.33,12212.37 ; v2(8562.08,10192.28) 8562.08,10814.99 8712.53,10965.43 8871.7,10965.43 ; v2(9409.71,10717.53) 9491.89,10717.53 9630.19,10855.83 9630.19,10937.84 ; J3.2@8188.19,12518.11 8193.93,12512.37 8235.87,12512.37 8266.64,12481.61 8266.64,12240.67 ; 8238.33,12212.37 8246.94,12212.37 8266.64,12192.67 ; 8238.33,12212.37 8266.64,12240.67 ; 8266.64,12192.67 8266.64,12240.67 ; 8871.7,10965.43 8911.03,10965.43 ; 8871.7,10965.43 v2(8911.03,11004.75) ; 8911.03,10965.43 8950.35,10965.43 ; 8911.03,10965.43 v2(8911.03,11004.75) ; v2(8911.03,11004.75) 8950.35,10965.43 ; v2(8911.03,11004.75) 8913.12,11006.85 v2(8942.13,11006.85) 8983.55,10965.43 ; 8950.35,10965.43 8983.55,10965.43 ; 8983.55,10965.43 9602.6,10965.43 ; 9602.6,10965.43 9630.19,10937.84 ; 9602.6,10965.43 v2(9630.19,10965.43) 9630.19,10937.84
VDDA: C10.2 J4.5 J7.3 R25.2 R26.1 U2.22 | length 3475.4
  Top Layer w8: C10.2@9015.02,11841.03 9028.52,11827.53 9092.7,11763.35 9115.48,11763.35 9161.03,11717.81 U2.22@9161.03,11676.04
  Top Layer w20: R26.1@9006.35,12058.4 9003.93,12060.82 8973.93,12060.82 8954.59,12041.49 8954.59,11985.76 8954.59,11972.84 ; C10.2@9015.02,11841.03 8984.88,11841.03 8963.38,11862.53 8954.59,11871.32 8954.59,11926.2 ; 8954.59,11926.2 8954.59,11949.52 8954.59,11972.84 ; 8954.59,11926.2 8931.27,11949.52 8954.59,11972.84
  Top Layer w22: v2(8936.87,12342.5) 8910.85,12316.48 8906.02,12316.48 v2(8904.87,12315.33) 8871.34,12315.33 8679.03,12123.02 8679.03,12001.43 8730.94,11949.52 8931.27,11949.52 8949.59,11949.52 ; v2(9858.2,12256.55) v2(9832.75,12231.07) 9764.02,12162.33 v2@9484.97,12162.33 ; v2@9447.8,12162.33 9465.94,12144.19 9466.83,12144.19 ; v2@9447.8,12162.33 v2(9477.63,12162.33) ; v2@9447.8,12162.33 v2(9446.17,12162.33) R25.2@9446.17,12124.52 9447.16,12124.52 9466.83,12144.19 ; 9466.83,12144.19 v2@9476.48,12153.84 ; v2@9476.48,12153.84 v2@9484.97,12162.33 ; v2@9476.48,12153.84 9476.48,12161.18 v2(9477.63,12162.33) ; v2(9477.63,12162.33) v2@9484.97,12162.33
  Bottom Layer w22: v2(8904.87,12315.33) 8906.02,12316.48 8910.85,12316.48 8984.43,12390.06 9218.45,12390.06 v2@9445.02,12163.48 ; v2(9446.17,12162.33) v2@9445.02,12163.48 ; v2(9477.63,12162.33) 9476.48,12163.48 v2@9445.02,12163.48 ; v2(9832.75,12231.07) 9858.22,12231.07 ; v2(9832.75,12231.07) v2(9858.2,12256.55) ; 9920.49,12231.07 9883.68,12231.07 ; J4.5@10488.19,12318.11 10480.11,12318.11 10440.11,12278.11 J7.3@10288.19,12278.11 10241.15,12231.07 9883.68,12231.07 ; 9858.22,12231.07 9883.68,12231.07 ; 9858.22,12231.07 v2(9858.2,12256.55) ; v2(9858.2,12256.55) 9883.68,12231.07
VREF+: R26.2 U2.21 | length 394.5
  Top Layer w8: R26.2@9006.35,11997.77 9007.33,11997.77 9021.14,11983.96 9021.14,11982.98 9082.46,11921.66 9082.46,11848.47 9180.71,11750.22 U2.21@9180.71,11676.04
VREF-: R23.2 U2.20 | length 374.4
  Top Layer w8: R23.2@9074.6,11997.77 9075.58,11997.77 9089.39,11983.96 9089.39,11982.98 9098.92,11973.45 9098.92,11852.51 9200.4,11751.04 U2.20@9200.4,11676.04
XI: C7.2 U2.12 Y1.1 | length 434.6
  Top Layer w8: Y1.1@9321.51,11899.8 9365.3,11943.6 9365.3,12025.57 C7.2@9324.17,12066.69 ; Y1.1@9325.98,11895.34 9325.98,11808.76 9357.88,11776.86 U2.12@9357.88,11676.04
XO: C8.2 U2.13 Y1.3 | length 429.2
  Top Layer w8: C8.2@9247.17,12066.69 9247.17,11986.89 9246.17,11985.89 9246.17,11981.95 9289.76,11938.36 9289.76,11813.66 9338.19,11765.23 U2.13@9338.19,11676.04
pads on no net: P2. P2.7 P6.A8 P6.B8 P7.A8 P7.B8 P9.A8 P9.B8 S1.2 S1.4 S2.2 S2.4 S3.0 S3.2 U1. U2.0 U3.3 U3.6 U3.9 U3.10 U3.11

## Polygon pours and split planes (outlines as drawn)
GND on Top Layer "GND" (hatched Horizontal grid 8 track 8, remove dead copper, pour order 1): 7880.72,13625.52 10789.13,13625.52 10789.13,9539.11 7874.07,9539.11
GND on Bottom Layer "GND" (hatched Horizontal grid 8 track 8, remove dead copper, pour order 0): 7877.89,13632.16 7877.89,9552.55 10794.53,9552.55 10794.53,13643.71 10803.62,13643.71

## Keep-outs
Keep-Out Layer:
  lines w6: 8763.39,12813.78 ccw(c8763.39,12813.78) 8763.39,12813.78
  lines w10: 7881.5,12853.15 7881.5,13553.56 cw(c7960.24,13553.56) 7960.24,13632.3 10716.14,13632.3 ; 7881.5,12853.15 7881.5,12853.15 ; 7881.5,12853.15 8527.17,12853.15 cw(c8527.17,12833.46) 8527.17,12813.78 7881.5,12813.78 7881.5,9639.04 ccw(c7960.24,9639.04) 7960.24,9560.3 10716.14,9560.3 ccw(c10716.14,9639.04) 10794.88,9639.04 10794.88,12813.78 ; 8763.39,12853.15 ccw(c8763.39,12833.46) 8763.39,12813.78 9913.09,12813.78 ccw(c9913.09,12833.46) 9913.09,12853.15 8763.39,12853.15 ; 8763.39,12853.15 8763.39,12853.15 ; 10149.21,12853.15 ccw(c10149.21,12833.46) 10149.21,12813.78 10794.88,12813.78 ; 10149.21,12853.15 ccw(c10149.21,12853.15) 10149.21,12853.15 ; 10149.21,12853.15 10794.88,12853.15 10794.88,13553.56 ccw(c10716.14,13553.56) 10716.14,13632.3 ; 10716.14,13632.3 10716.14,13632.3 ; 10794.88,12813.78 ccw(c10794.88,12813.78) 10794.88,12813.78

## Silkscreen, mask and mechanical layers (free items; w line width, h text height)
Top Overlay:
  text "5V" at 7948.04,13497.87 h35 r0.18
  text "5V" at 8253.53,13497.87 h35 r0.18
  text "RX0" at 7920.22,13397.77 h35 r0.18
  text "TX" at 8253.53,13397.77 h35 r0.18
  text "V33" at 9891.64,13386.03 h35 r0.18
  text "USB_P" at 9694.17,13374.17 h35 r0.18
  text "OFF" at 10305.77,13332.56 h35 r0.18
  text "ON" at 10446.29,13332.56 h35 r0.18
  text "TX0" at 7923.88,13297.68 h35 r0.18
  text "RX" at 8253.53,13297.68 h35 r0.18
  text "PWR" at 9561.18,13214.62 h35 r0.18
  text "GND" at 7916.55,13197.59 h35 r0.18
  text "GND" at 8253.53,13197.59 h35 r0.18
  text "RUN" at 9564.85,13107.55 h35 r0.18
  text "CLK0" at 7892.72,13097.5 h35 r0.18
  text "CLK" at 8253.53,13097.5 h35 r0.18
  text "CON" at 9560.43,13000.48 h35 r0.18
  text "DIO0" at 7909.22,12997.41 h35 r0.18
  text "DIO" at 8253.53,12997.41 h35 r0.18
  text "VCC" at 7914.88,12897.32 h35 r0.18
  text "VCC" at 8253.53,12897.32 h35 r0.18
  text "CH32V307V-R1-1v0" at 10173.13,12738.77 h40 r0.18
  text "PC13" at 10652.93,12498.13 h35 r0.18
  text "VCC" at 7906.28,12492.19 h35 r0.18
  text "VCC" at 8250.58,12492.19 h35 r0.18
  text "PB10" at 10089.9,12454.17 h35 r0.18
  text "VBAT" at 10650.18,12398.05 h35 r0.18
  text "BOOT1" at 7887.36,12389.48 h33 r0.18
  text "BOOT0" at 8250.58,12389.48 h33 r0.18
  text "PB11" at 10104.89,12353.96 h35 r0.18
  text "PE6" at 10670.26,12297.97 h35 r0.18
  text "GND" at 7907.12,12294.43 h35 r0.18
  text "GND" at 8250.58,12294.43 h33 r0.18
  text "VDDA" at 10081.07,12253.75 h35 r0.18
  text "PE5" at 10669.43,12197.89 h35 r0.18
  text "VCC" at 7908.88,12191.59 h33 r0.18
  text "VCC" at 8250.58,12191.59 h33 r0.18
  text "GND" at 10111.89,12153.54 h35 r0.18
  text "PE4" at 10668.59,12097.81 h35 r0.18
  text "GND" at 7907.12,12095.55 h35 r0.18
  text "PB13" at 10089.9,12053.33 h35 r0.18
  text "PE3" at 10669.43,11997.74 h35 r0.18
  text "VCC" at 8461.43,11996.44 h35 r0.18
  text "ELED1" at 7896,11988.42 h33 r0.18
  text "PB14" at 10088.23,11953.12 h35 r0.18
  text "PE2" at 10669.43,11897.66 h35 r0.18
  text "NRST" at 8461.43,11896.32 h35 r0.18
  text "ELED2" at 7888.93,11887.75 h33 r0.18
  text "PB15" at 10089.9,11852.91 h35 r0.18
  text "PE1" at 10676.92,11797.58 h35 r0.18
  text "VCC" at 8461.43,11796.19 h35 r0.18
  text "VCC" at 7906.28,11791.78 h35 r0.18
  text "PB12" at 10089.9,11752.7 h35 r0.18
  text "PE0" at 10669.43,11697.5 h35 r0.18
  text "+5V" at 8461.43,11696.06 h35 r0.18
  text "+5V" at 7902.7,11690.96 h35 r0.18
  text "PB0" at 10115.56,11652.49 h35 r0.18
  text "PB7" at 10667.59,11597.42 h35 r0.18
  text "GND" at 8461.43,11595.93 h35 r0.18
  text "LED1" at 7906.37,11589.47 h35 r0.18
  text "PB1" at 10130.56,11552.28 h35 r0.18
  text "PB6" at 10668.43,11497.35 h35 r0.18
  text "GND" at 8461.43,11495.81 h35 r0.18
  text "LED2" at 7898.87,11488.79 h35 r0.18
  text "PD6" at 10336.63,11482.8 h35 r0.18
  text "PB4" at 10666.76,11397.27 h35 r0.18
  text "+5V" at 8461.43,11395.68 h35 r0.18
  text "PB9" at 10117.22,11394.68 h35 r0.18
  text "KEY" at 7909.12,11389.8 h35 r0.18
  text "PB3" at 10667.59,11297.19 h35 r0.18
  text "GND" at 8250.58,11295.96 h35 r0.18
  text "PB8" at 10115.56,11293.9 h35 r0.18
  text "GND" at 7907.12,11292.03 h35 r0.18
  text "PD7" at 10667.59,11197.11 h35 r0.18
  text "PA0" at 8461.43,11194.32 h35 r0.18
  text "PB5" at 10115.56,11193.11 h35 r0.18
  text "PA14" at 7893.45,11192.33 h35 r0.18
  text "PD5" at 10667.59,11097.03 h35 r0.18
  text "PA1" at 8461.43,11094.59 h35 r0.18
  text "PA6" at 10113.56,11092.33 h35 r0.18
  text "PA13" at 7894.29,11089.07 h35 r0.18
  text "PD4" at 10666.76,10996.96 h35 r0.18
  text "PA2" at 8461.43,10994.86 h35 r0.18
  text "PC0" at 7907.12,10991.91 h35 r0.18
  text "PA7" at 10111.89,10991.54 h35 r0.18
  text "PD3" at 10667.59,10896.88 h35 r0.18
  text "PA3" at 8461.43,10895.13 h35 r0.18
  text "PA8" at 10111.89,10890.76 h35 r0.18
  text "PC1" at 7914.61,10888.22 h35 r0.18
  text "PD2" at 10667.59,10796.8 h35 r0.18
  text "PA4" at 8461.43,10795.4 h35 r0.18
  text "PC2" at 7907.12,10792.54 h35 r0.18
  text "PA9" at 10113.56,10789.97 h35 r0.18
  text "PD1" at 10675.09,10696.72 h35 r0.18
  text "PA5" at 8461.43,10695.68 h35 r0.18
  text "PC3" at 7907.12,10692.38 h35 r0.18
  text "PA10" at 10086.23,10689.19 h35 r0.18
  text "PC12" at 10652.93,10596.65 h35 r0.18
  text "PD0" at 10303.63,10594.15 h35 r0.18
  text "PC4" at 7906.28,10589.8 h35 r0.18
  text "PC5" at 8256.75,10589.79 h35 r0.18
  text "PC10" at 10652.93,10496.57 h35 r0.18
  text "PC11" at 10296.46,10493.47 h35 r0.18
  text "PB2" at 7908.95,10491.31 h35 r0.18
  text "PE7" at 8256.75,10490.2 h35 r0.18
  text "NC" at 10681.42,10396.49 h35 r0.18
  text "PE8" at 7910.78,10393.16 h35 r0.18
  text "PA15" at 10288.96,10392.79 h35 r0.18
  text "PE9" at 8256.75,10390.61 h35 r0.18
  text "PA11" at 10660.43,10296.41 h35 r0.18
  text "PA12" at 10288.96,10292.11 h35 r0.18
  text "PE10" at 7897.95,10290.82 h35 r0.18
  text "PE11" at 8256.75,10291.02 h35 r0.18
  text "PC8" at 10665.76,10196.33 h35 r0.18
  text "PE12" at 7897.95,10191.9 h35 r0.18
  text "PE13" at 8256.75,10191.43 h35 r0.18
  text "PC9" at 10302.63,10191.42 h35 r0.18
  text "PC6" at 10666.59,10096.26 h35 r0.18
  text "PE15" at 8256.75,10091.84 h35 r0.18
  text "PC7" at 10301.79,10090.74 h35 r0.18
  text "PE14" at 7897.12,10088.48 h35 r0.18
  text "PD14" at 10653.93,9996.18 h35 r0.18
  text "PD8" at 7908.95,9993.15 h35 r0.18
  text "PD9" at 8256.75,9992.25 h35 r0.18
  text "PD15" at 10290.8,9990.06 h35 r0.18
  text "PD12" at 10654.76,9896.1 h35 r0.18
  text "PD10" at 7896.12,9892.66 h35 r0.18
  text "PD11" at 8256.75,9892.66 h35 r0.18
  text "PD13" at 10290.8,9889.38 h35 r0.18
Bottom Overlay:
  drawing of 3656 lines, arcs and shapes, not listed
  text "http://wch.cn" at 9611.5,11985.25 h98.43
Top Solder:
  drawing of 3656 lines, arcs and shapes, not listed
  text "http://wch.cn" at 10222.2,12898.58 h98.43
Mechanical 1:
  lines w10: 9912.99,12813.68 ccw(c9912.99,12833.46) 9912.99,12853.25 ; 9914.95,12813.78 8763.39,12813.78 cw(c8763.39,12833.46) 8763.39,12853.15 9914.95,12853.15 ; 10794.88,12853.15 10149.21,12853.15 ccw(c10149.21,12833.46) 10149.21,12813.78 10794.88,12813.78 10794.88,9639.04 cw(c10716.14,9639.04) 10716.14,9560.3 7960.24,9560.3 cw(c7960.24,9639.04) 7881.5,9639.04 7881.5,12813.78 8527.17,12813.78 ccw(c8527.17,12833.46) 8527.17,12853.15 7881.5,12853.15 7881.5,13553.56 cw(c7960.24,13553.56) 7960.24,13632.3 10716.14,13632.3 cw(c10716.14,13553.56) 10794.88,13553.56 10794.88,12853.15 ; 10794.88,12853.15 10794.88,12853.15

## Text inside footprints (layer, text, board x,y; h text height)
D1: Top Overlay "+" at 9717.39,13121.09 h40 r90
D2: Top Overlay "+" at 9717.39,13014.34 h40 r90
D3: Top Overlay "+" at 9717.39,13227.83 h40 r90
LED1: Top Overlay "+" at 9295.81,12346.59 h40 r90
LED2: Top Overlay "+" at 9295.81,12273.44 h40 r90
PWR: Top Overlay "+" at 8499.59,10021.26 h40 r180